# Altium PCB PCB1.PcbDoc
Units mm, origin at the board's own origin, x right, y up, seen from the top; angles counter-clockwise.
Board outline 90 x 45 mm, 2 copper layers (Top Layer, Bottom Layer); 95 components, 49 nets, 291 pads, 92 vias.
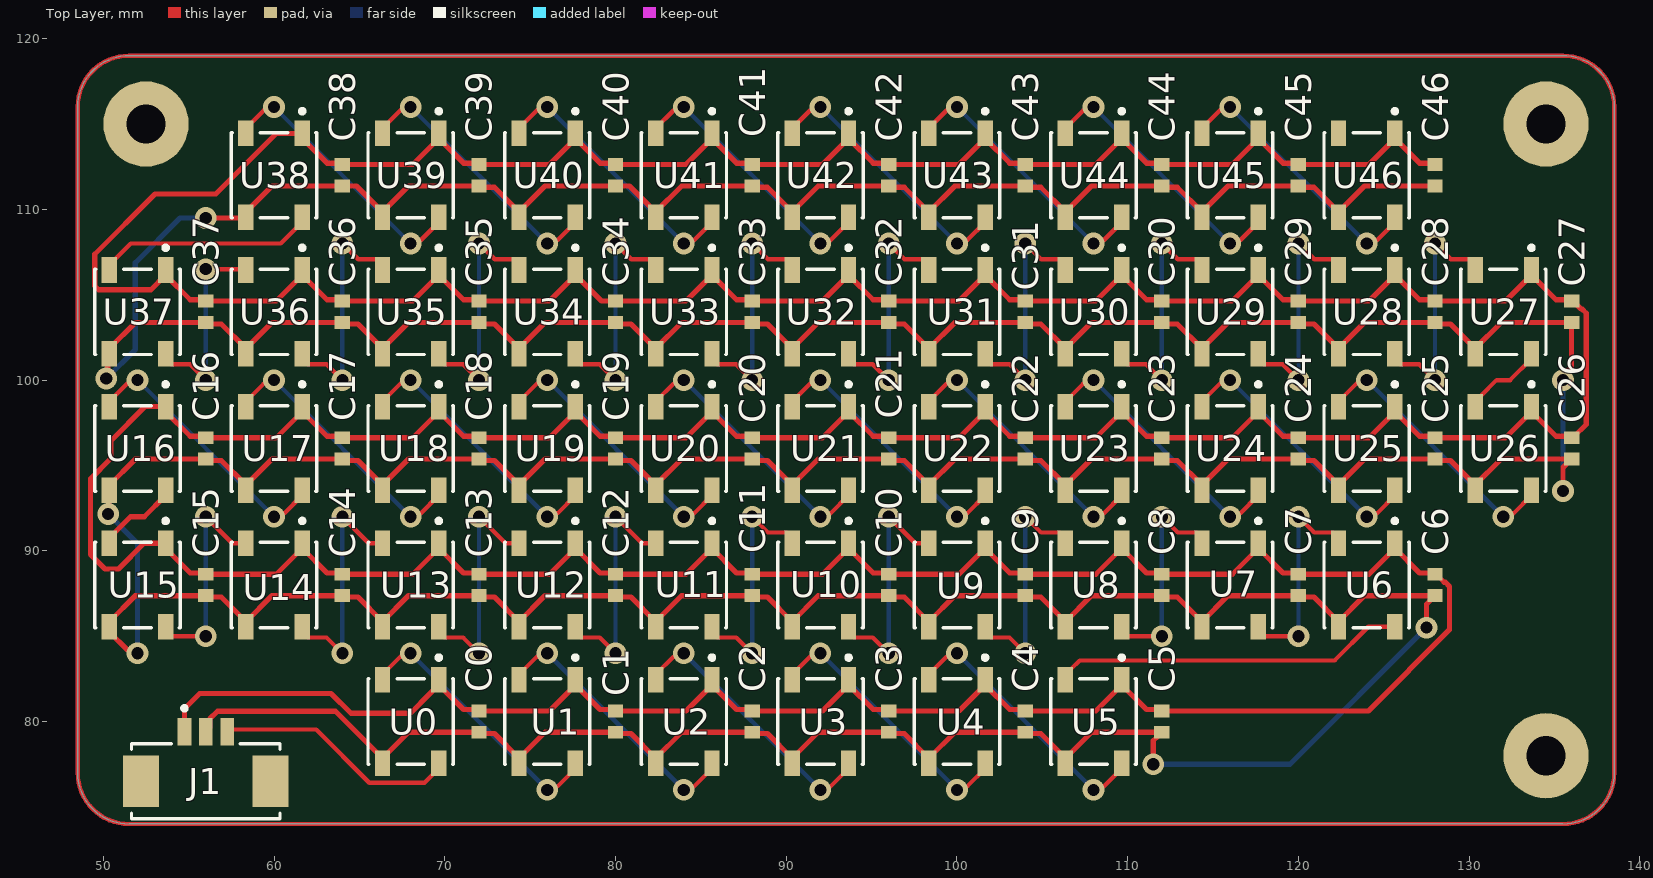
[diagram p0: Top Layer view]
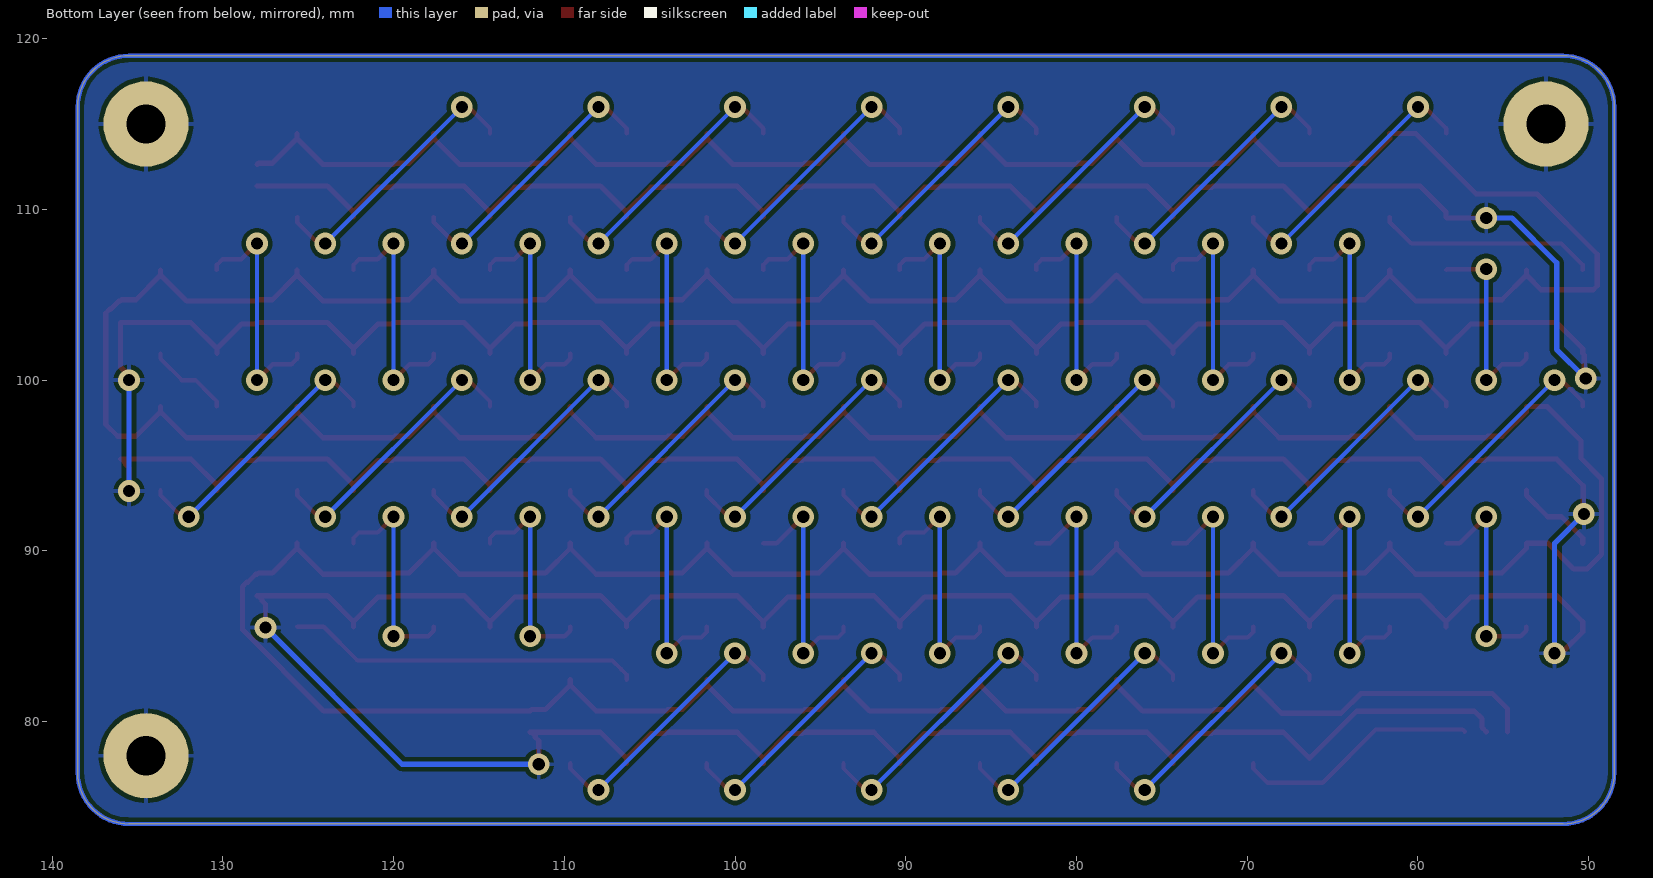
[diagram p1: Bottom Layer view, seen from below]
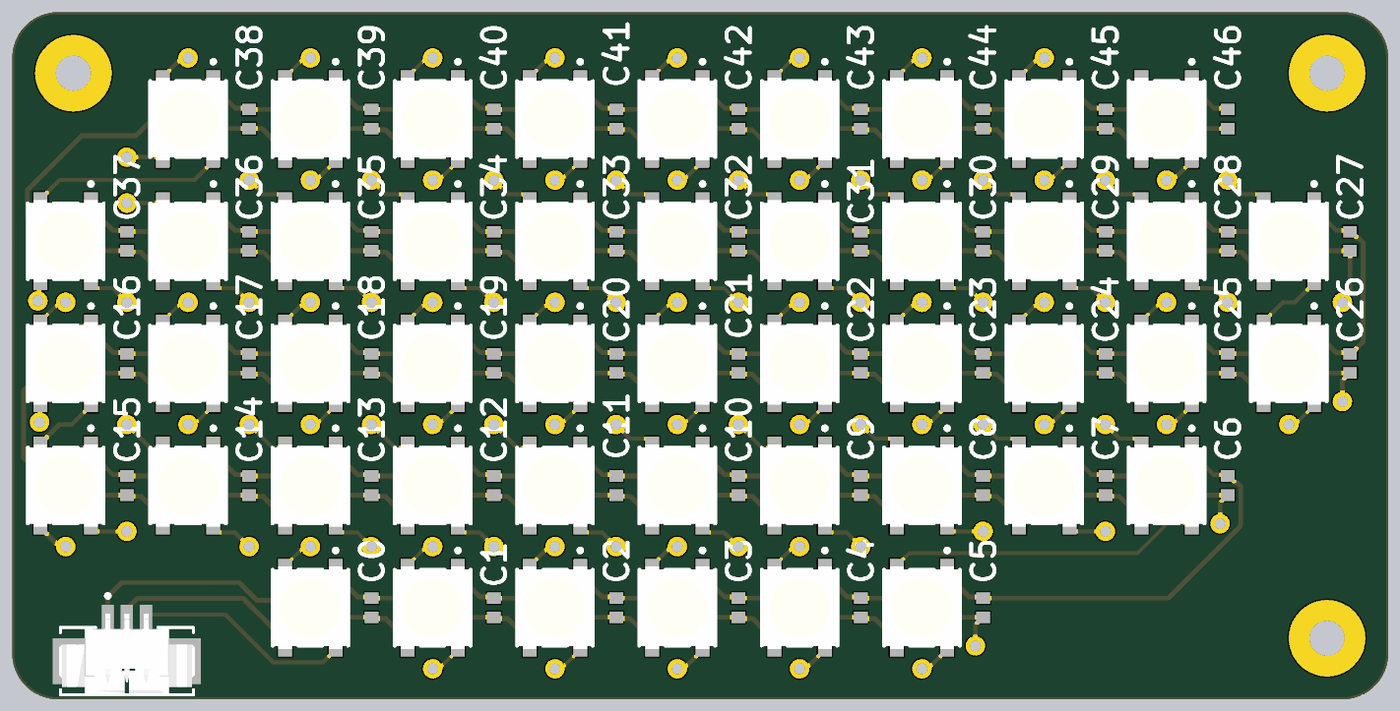
[diagram p2: 3D render of the assembled board from above, using the file's embedded part models]

## Layer stack, top to bottom
Top Solder: solder mask 0.0102, Solder Resist, Dk 3.5
Top Layer: signal copper 0.0356
Dielectric 1: dielectric 0.32, FR-4, Dk 4.8
Bottom Layer: signal copper 0.0356
Bottom Solder: solder mask 0.0102, Solder Resist, Dk 3.5

## Board outline
48.5,77 48.5,116 cw(c51.5,116) 51.5,119 135.5,119 cw(c135.5,116) 138.5,116 138.5,77 cw(c135.5,77) 135.5,74 51.5,74 cw(c51.5,77)

## Design rules (kind name [scope] priority, off if disabled: settings)
Clearance [All] p1: gap=0.254 ignorepadtopadclearanceinfootprint=FALSE
PolygonConnect [All] p1: connectstyle=Relief reliefconductorwidth=0.254 reliefentries=4 polygonreliefangle="90 Angle" airgapwidth=0.254
RoutingVias [All] p1: holewidth=0.711 width=1.27 viastyle="Through Hole" minholewidth=0.711 minwidth=1.27 maxholewidth=0.711 maxwidth=1.27
SolderMaskExpansion [All] p1: expansion=0.102 istentingtop=FALSE
SupplyNets "Schematic Supply Nets_1" [InNet('GND')] p1: voltage=0.000
SupplyNets "Schematic Supply Nets" [InNet('VCC')] p2: voltage=0.000
Width [All] p1: maxlimit=0.305 minlimit=0.254 preferedwidth=0.254 minimp=50.000000 maximp=50.000000 favimp=50.000000
30 further rules are at their usual default settings.

## Components (designator, comment, footprint, x,y, rotation, side; value= is the part's Value field where it differs from the comment)
C0 "VJ0603Y104JXJAC" CAPC1608X92X38LL15T08 72,80 r270 top
C1 "VJ0603Y104JXJAC" CAPC1608X92X38LL15T08 80,80 r270 top
C2 "VJ0603Y104JXJAC" CAPC1608X92X38LL15T08 88,80 r270 top
C3 "VJ0603Y104JXJAC" CAPC1608X92X38LL15T08 96,80 r270 top
C4 "VJ0603Y104JXJAC" CAPC1608X92X38LL15T08 104,80 r270 top
C5 "VJ0603Y104JXJAC" CAPC1608X92X38LL15T08 112,80 r270 top
C6 "VJ0603Y104JXJAC" CAPC1608X92X38LL15T08 128,88 r270 top
C7 "VJ0603Y104JXJAC" CAPC1608X92X38LL15T08 120,88 r270 top
C8 "VJ0603Y104JXJAC" CAPC1608X92X38LL15T08 112,88 r270 top
C9 "VJ0603Y104JXJAC" CAPC1608X92X38LL15T08 104,88 r270 top
C10 "VJ0603Y104JXJAC" CAPC1608X92X38LL15T08 96,88 r270 top
C11 "VJ0603Y104JXJAC" CAPC1608X92X38LL15T08 88,88 r270 top
C12 "VJ0603Y104JXJAC" CAPC1608X92X38LL15T08 80,88 r270 top
C13 "VJ0603Y104JXJAC" CAPC1608X92X38LL15T08 72,88 r270 top
C14 "VJ0603Y104JXJAC" CAPC1608X92X38LL15T08 64,88 r270 top
C15 "VJ0603Y104JXJAC" CAPC1608X92X38LL15T08 56,88 r270 top
C16 "VJ0603Y104JXJAC" CAPC1608X92X38LL15T08 56,96 r270 top
C17 "VJ0603Y104JXJAC" CAPC1608X92X38LL15T08 64,96 r270 top
C18 "VJ0603Y104JXJAC" CAPC1608X92X38LL15T08 72,96 r270 top
C19 "VJ0603Y104JXJAC" CAPC1608X92X38LL15T08 80,96 r270 top
C20 "VJ0603Y104JXJAC" CAPC1608X92X38LL15T08 88,96 r270 top
C21 "VJ0603Y104JXJAC" CAPC1608X92X38LL15T08 96,96 r270 top
C22 "VJ0603Y104JXJAC" CAPC1608X92X38LL15T08 104,96 r270 top
C23 "VJ0603Y104JXJAC" CAPC1608X92X38LL15T08 112,96 r270 top
C24 "VJ0603Y104JXJAC" CAPC1608X92X38LL15T08 120,96 r270 top
C25 "VJ0603Y104JXJAC" CAPC1608X92X38LL15T08 128,96 r270 top
C26 "VJ0603Y104JXJAC" CAPC1608X92X38LL15T08 136,96 r270 top
C27 "VJ0603Y104JXJAC" CAPC1608X92X38LL15T08 136,104 r270 top
C28 "VJ0603Y104JXJAC" CAPC1608X92X38LL15T08 128,104 r270 top
C29 "VJ0603Y104JXJAC" CAPC1608X92X38LL15T08 120,104 r270 top
C30 "VJ0603Y104JXJAC" CAPC1608X92X38LL15T08 112,104 r270 top
C31 "VJ0603Y104JXJAC" CAPC1608X92X38LL15T08 104,104 r270 top
C32 "VJ0603Y104JXJAC" CAPC1608X92X38LL15T08 96,104 r270 top
C33 "VJ0603Y104JXJAC" CAPC1608X92X38LL15T08 88,104 r270 top
C34 "VJ0603Y104JXJAC" CAPC1608X92X38LL15T08 80,104 r270 top
C35 "VJ0603Y104JXJAC" CAPC1608X92X38LL15T08 72,104 r270 top
C36 "VJ0603Y104JXJAC" CAPC1608X92X38LL15T08 64,104 r270 top
C37 "VJ0603Y104JXJAC" CAPC1608X92X38LL15T08 56,104 r270 top
C38 "VJ0603Y104JXJAC" CAPC1608X92X38LL15T08 64,112 r270 top
C39 "VJ0603Y104JXJAC" CAPC1608X92X38LL15T08 72,112 r270 top
C40 "VJ0603Y104JXJAC" CAPC1608X92X38LL15T08 80,112 r270 top
C41 "VJ0603Y104JXJAC" CAPC1608X92X38LL15T08 88,112 r270 top
C42 "VJ0603Y104JXJAC" CAPC1608X92X38LL15T08 96,112 r270 top
C43 "VJ0603Y104JXJAC" CAPC1608X92X38LL15T08 104,112 r270 top
C44 "VJ0603Y104JXJAC" CAPC1608X92X38LL15T08 112,112 r270 top
C45 "VJ0603Y104JXJAC" CAPC1608X92X38LL15T08 120,112 r270 top
C46 "VJ0603Y104JXJAC" CAPC1608X92X38LL15T08 128,112 r270 top
J1 "53261-0371" FP-53261-0371-MFG 56,76.5 r0 top
U0 "1655" ADA-RGB-1655_V 68,80 r270 top
U1 "1655" ADA-RGB-1655_V 76,80 r270 top
U2 "1655" ADA-RGB-1655_V 84,80 r270 top
U3 "1655" ADA-RGB-1655_V 92,80 r270 top
U4 "1655" ADA-RGB-1655_V 100,80 r270 top
U5 "1655" ADA-RGB-1655_V 108,80 r270 top
U6 "1655" ADA-RGB-1655_V 124,88 r270 top
U7 "1655" ADA-RGB-1655_V 116,88 r270 top
U8 "1655" ADA-RGB-1655_V 108,88 r270 top
U9 "1655" ADA-RGB-1655_V 100,88 r270 top
U10 "1655" ADA-RGB-1655_V 92,88 r270 top
U11 "1655" ADA-RGB-1655_V 84,88 r270 top
U12 "1655" ADA-RGB-1655_V 76,88 r270 top
U13 "1655" ADA-RGB-1655_V 68,88 r270 top
U14 "1655" ADA-RGB-1655_V 60,88 r270 top
U15 "1655" ADA-RGB-1655_V 52,88 r270 top
U16 "1655" ADA-RGB-1655_V 52,96 r270 top
U17 "1655" ADA-RGB-1655_V 60,96 r270 top
U18 "1655" ADA-RGB-1655_V 68,96 r270 top
U19 "1655" ADA-RGB-1655_V 76,96 r270 top
U20 "1655" ADA-RGB-1655_V 84,96 r270 top
U21 "1655" ADA-RGB-1655_V 92,96 r270 top
U22 "1655" ADA-RGB-1655_V 100,96 r270 top
U23 "1655" ADA-RGB-1655_V 108,96 r270 top
U24 "1655" ADA-RGB-1655_V 116,96 r270 top
U25 "1655" ADA-RGB-1655_V 124,96 r270 top
U26 "1655" ADA-RGB-1655_V 132,96 r270 top
U27 "1655" ADA-RGB-1655_V 132,104 r270 top
U28 "1655" ADA-RGB-1655_V 124,104 r270 top
U29 "1655" ADA-RGB-1655_V 116,104 r270 top
U30 "1655" ADA-RGB-1655_V 108,104 r270 top
U31 "1655" ADA-RGB-1655_V 100,104 r270 top
U32 "1655" ADA-RGB-1655_V 92,104 r270 top
U33 "1655" ADA-RGB-1655_V 84,104 r270 top
U34 "1655" ADA-RGB-1655_V 76,104 r270 top
U35 "1655" ADA-RGB-1655_V 68,104 r270 top
U36 "1655" ADA-RGB-1655_V 60,104 r270 top
U37 "1655" ADA-RGB-1655_V 52,104 r270 top
U38 "1655" ADA-RGB-1655_V 60,112 r270 top
U39 "1655" ADA-RGB-1655_V 68,112 r270 top
U40 "1655" ADA-RGB-1655_V 76,112 r270 top
U41 "1655" ADA-RGB-1655_V 84,112 r270 top
U42 "1655" ADA-RGB-1655_V 92,112 r270 top
U43 "1655" ADA-RGB-1655_V 100,112 r270 top
U44 "1655" ADA-RGB-1655_V 108,112 r270 top
U45 "1655" ADA-RGB-1655_V 116,112 r270 top
U46 "1655" ADA-RGB-1655_V 124,112 r270 top

## Footprints (in the part's own frame and the unit in brackets; to place one, negate y for a bottom-side part, rotate by r counter-clockwise, add the part's x,y. Pads: shape width x height; smd on the part's side, far side on the other; paste and mask are expansions set on the pad)
ADA-RGB-1655_V [mm] "SMD, 4-Leads, Body 5x5mm"
  rect 1.5x0.9 smd: 1(-2.45,1.65) 2(-2.45,-1.65) 3(2.45,-1.65) 4(2.45,1.65)
  silkscreen extent -3.87,-2.5 2.5,2.5, body extent -2.7,-2.5 2.7,2.5, height 1.68
CAPC1608X92X38LL15T08 [mm] "Chip Capacitor, 2-Leads, Body 1.60x0.80mm, IPC High Density"
  rect 0.75x0.9 smd: 1(-0.625,0) 2(0.625,0)
  body extent -0.87,-0.48 0.87,0.48, height 0.92
FP-53261-0371-MFG [mm]
  rect 0.8x1.6 smd paste+0 mask+0: 1(-1.25,2.9) 2(0,2.9) 3(1.25,2.9)
  rect 2.1x3 smd paste+0 mask+0: 4(-3.8,0) 5(3.8,0)
  silkscreen extent -4.35,-2.2 4.35,4.4, body extent -4.95,-2.3 4.95,3.8, height 0.25

## Part data
C0 C1 C2 C3 C4 C5 C6 C7 C8 C9 C10 C11 C12 C13 C14 C15 C16 C17 C18 C19 C20 C21 C22 C23 C24 C25 C26 C27 C28 C29 C30 C31 C32 C33 C34 C35 C36 C37 C38 C39 C40 C41 C42 C43 C44 C45 C46: library part CMP-1035-02583-2, Manufacturer=Vitramon, Part Number=VJ0603Y104JXJAC
J1: library part CMP-04776-000071-1, "CONN HEADER SMD R/A 3POS 1.25MM", Ambient Temperature Range High=+105°C, Ambient Temperature Range Low=-40°C, Current Rating=1A, Manufacturer=Molex, Package=0, Temperature="-40°C to +105°C", Voltage Rating=125V, Automotive=No, Category=Conn, ComponentLink2Description=Datasheet, ComponentLink2URL=https://www.molex.com/webdocs/datasheets/pdf/en-us/0532610371_PCB_HEADERS.pdf, Conn Gender=Male, Conn Orientation="Right Angle", Contact Material=Tin,Nickel, Device Class L1=Connectors, Device Class L2="Headers and Wire Housings", Device Class L3=unset, Digikey Description="CONN HEADER SMD R/A 3POS 1.25MM", Footprint Url=https://www.molex.com/pdm_docs/sd/532610371_sd.pdf, Height=3.6mm, Lead Free=Yes, Manufacturer Part Number=53261-0371, Mouser Description="1.25mm (.049\") Pitch PicoBlade Header, Surface Mount, Right Angle, Lead-free, 3 Circuits", Number Of Contacts=3, Number Of Rows=1, Octopart=https://octopart.com/53261-0371-molex-655314, Pitch=1.25mm, RoHS=TRUE, Temperature Range High=+105°C, Temperature Range Low=-40°C
U0 U1 U2 U3 U4 U5 U6 U7 U8 U9 U10 U11 U12 U13 U14 U15 U16 U17 U18 U19 U20 U21 U22 U23 U24 U25 U26 U27 U28 U29 U30 U31 U32 U33 U34 U35 U36 U37 U38 U39 U40 U41 U42 U43 U44 U45 U46: library part CMP-2000-05026-1, "Intelligent Control LED Integrated Light Source, 3.5 to 5.3 V, -25 to 80 degC, 4-Pin SMD, RoHS, Tape and Reel", Color=Red,Green,Blue(RGB), Manufacturer=Adafruit-Industries-LLC, Package Description="4-Pin Surface Mount Device, Body 5 x 5 mm", Category=Optoelectronics, Configuration=Discrete, Controller Type=-, Datasheet URL=http://datasheet.octopart.com/ADA1655-Adafruit-Industries-datasheet-32028139.pdf, Datasheet Version=May-13, Family=Addressable,Specialty, Interface=-, Manufacturer URL=https://www.adafruit.com/, Mounting Type=SurfaceMount, Number of LEDs=10, Package Reference=1655, Series=Neopixel, Size / Dimension=5.00mmLx5.00mmW, Utilized LED=WS2812(5050)

## Free pads (board coordinates)
  round 5 hole 2.3: 2(134.5,78) 2(212.5,40.5) 3(52.5,115) 4(134.5,115)

## Via types
v1: diameter 1.27, hole 0.711, Top Layer to Bottom Layer, 92 vias

## Nets (pads, with @x,y where several pads share a name; then routed paths per layer and width w, separated by ;. In a path a pad name is that pad's centre, name@x,y a point inside that pad or via, vN(x,y) a via of type N, cw(c..) or ccw(c..) an arc to the next point about the centre after c; other vN are vias at no path point)
Din: J1.3 U0.4 | length 14.4
  Top Layer w0.254: J1.3 57.385,79.535 62.465,79.535 65.581,76.419 68.811,76.419 69.319,76.927 69.327,76.927 69.65,77.25 U0.4
GND: C0.2 C1.2 C2.2 C3.2 C4.2 C5.2 C6.2 C7.2 C8.2 C9.2 C10.2 C11.2 C12.2 C13.2 C14.2 C15.2 C16.2 C17.2 C18.2 C19.2 C20.2 C21.2 C22.2 C23.2 C24.2 C25.2 C26.2 C27.2 C28.2 C29.2 C30.2 C31.2 C32.2 C33.2 C34.2 C35.2 C36.2 C37.2 C38.2 C39.2 C40.2 C41.2 C42.2 C43.2 C44.2 C45.2 C46.2 J1.2 pad.2@134.5,78 pad.3 pad.4 U0.3 U1.3 U2.3 U3.3 U4.3 U5.3 U6.3 U7.3 U8.3 U9.3 U10.3 U11.3 U12.3 U13.3 U14.3 U15.3 U16.3 U17.3 U18.3 U19.3 U20.3 U21.3 U22.3 U23.3 U24.3 U25.3 U26.3 U27.3 U28.3 U29.3 U30.3 U31.3 U32.3 U33.3 U34.3 U35.3 U36.3 U37.3 U38.3 U39.3 U40.3 U41.3 U42.3 U43.3 U44.3 U45.3 U46.3 | length 510.7
  Top Layer w0.305: v1(50.175,100.089) 50.263,100.177 50.263,101.462 U37.3 50.35,101.85 51.875,103.375 C37.2 56.082,103.293 56.907,103.293 U36.3@58.35,101.85 ; v1(50.283,92.156) 50.317,92.189 50.317,93.817 51.875,95.375 C16.2 56.082,95.293 56.907,95.293 58.35,93.85 59.875,95.375 C17.2 64.082,95.293 64.907,95.293 U18.3@66.35,93.85 ; v1(52,84) 51.815,84.185 51.415,84.185 50.35,85.25 50.35,85.85 51.875,87.375 C15.2 56.082,87.293 56.907,87.293 U14.3@58.35,85.85 ; J1.2 56.248,79.648 56.248,80.172 56.682,80.606 63.594,80.606 66.35,77.85 67.875,79.375 C0.2 72.082,79.293 72.907,79.293 U1.3@74.35,77.85 ; v1(56,109.5) 58.3,109.5 U38.3 58.35,109.85 59.875,111.375 C38.2 64.825,111.375 66.35,109.85 67.875,111.375 C39.2 72.082,111.293 72.907,111.293 U40.3@74.35,109.85 ; U14.3 U14.3@58.35,85.85 ; U36.3 U36.3@58.35,101.85 ; U13.3 U13.3@66.35,85.85 ; U18.3 U18.3@66.35,93.85 ; U35.3 U35.3@66.35,101.85 ; U1.3 U1.3@74.35,77.85 ; U12.3 U12.3@74.35,85.85 ; U19.3 U19.3@74.35,93.85 ; U34.3 U34.3@74.35,101.85 ; U40.3 U40.3@74.35,109.85 ; U2.3 U2.3@82.35,77.85 ; U11.3 U11.3@82.35,85.85 ; U20.3 U20.3@82.35,93.85 ; U33.3 U33.3@82.35,101.85 ; U3.3 U3.3@90.35,77.85 ; U10.3 U10.3@90.35,85.85 ; U21.3 U21.3@90.35,93.85 ; U32.3 U32.3@90.35,101.85 ; U42.3 U42.3@90.35,109.85 ; U4.3 U4.3@98.35,77.85 ; U9.3 U9.3@98.35,85.85 ; U22.3 U22.3@98.35,93.85 ; U31.3 U31.3@98.35,101.85 ; U43.3 U43.3@98.35,109.85 ; U5.3 U5.3@106.35,77.85 ; U8.3 U8.3@106.35,85.85 ; U23.3 U23.3@106.35,93.85 ; U30.3 U30.3@106.35,101.85 ; U44.3 U44.3@106.35,109.85 ; v1(111.5,77.5) 111.5,78.875 111.702,79.077 111.702,79.152 C5.2@111.925,79.375 ; C5.2 C5.2@111.925,79.375 ; U7.3 U7.3@114.35,85.85 ; U24.3 U24.3@114.35,93.85 ; U29.3 U29.3@114.35,101.85 ; U45.3 U45.3@114.35,109.85 ; U6.3 U6.3@122.35,85.85 ; U25.3 U25.3@122.35,93.85 ; U28.3 U28.3@122.35,101.85 ; U46.3 U46.3@122.35,109.85 ; v1(127.5,85.5) 127.5,86.875 127.702,87.077 127.702,87.152 127.925,87.375 C6.2 123.875,87.375 U6.3@122.35,85.85 ; C46.2 123.875,111.375 U46.3@122.35,109.85 ; U26.3 U26.3@130.35,93.85 ; U27.3 U27.3@130.35,101.85 ; v1(135.5,93.5) 135.5,94.875 135.702,95.077 135.702,95.152 135.925,95.375 C26.2 131.875,95.375 U26.3@130.35,93.85 ; v1(135.5,100) 135.5,100.261 136,100.761 C27.2 131.875,103.375 U27.3@130.35,101.85 ; U14.3@58.35,85.85 59.875,87.375 C14.2 64.082,87.293 64.907,87.293 U13.3@66.35,85.85 ; U36.3@58.35,101.85 59.875,103.375 C36.2 64.082,103.293 64.907,103.293 U35.3@66.35,101.85 ; U13.3@66.35,85.85 67.875,87.375 C13.2 72.082,87.293 72.907,87.293 U12.3@74.35,85.85 ; U18.3@66.35,93.85 67.875,95.375 C18.2 72.082,95.293 72.907,95.293 U19.3@74.35,93.85 ; U35.3@66.35,101.85 67.875,103.375 C35.2 72.082,103.293 72.907,103.293 U34.3@74.35,101.85 ; U1.3@74.35,77.85 75.875,79.375 C1.2 80.082,79.293 80.907,79.293 U2.3@82.35,77.85 ; U12.3@74.35,85.85 75.875,87.375 C12.2 80.082,87.293 80.907,87.293 U11.3@82.35,85.85 ; U19.3@74.35,93.85 75.875,95.375 C19.2 80.082,95.293 80.907,95.293 U20.3@82.35,93.85 ; U34.3@74.35,101.85 75.875,103.375 C34.2 80.082,103.293 80.907,103.293 U33.3@82.35,101.85 ; U40.3@74.35,109.85 75.875,111.375 C40.2 80.825,111.375 82.35,109.85 83.875,111.375 C41.2 88.082,111.293 88.907,111.293 U42.3@90.35,109.85 ; U2.3@82.35,77.85 83.875,79.375 C2.2 88.082,79.293 88.907,79.293 U3.3@90.35,77.85 ; U11.3@82.35,85.85 83.875,87.375 C11.2 88.082,87.293 88.907,87.293 U10.3@90.35,85.85 ; U20.3@82.35,93.85 83.875,95.375 C20.2 88.082,95.293 88.907,95.293 U21.3@90.35,93.85 ; U33.3@82.35,101.85 83.875,103.375 C33.2 88.082,103.293 88.907,103.293 U32.3@90.35,101.85 ; U3.3@90.35,77.85 91.875,79.375 C3.2 96.082,79.293 96.907,79.293 U4.3@98.35,77.85 ; U10.3@90.35,85.85 91.875,87.375 C10.2 96.082,87.293 96.907,87.293 U9.3@98.35,85.85 ; U21.3@90.35,93.85 91.875,95.375 C21.2 96.082,95.293 96.907,95.293 U22.3@98.35,93.85 ; U32.3@90.35,101.85 91.875,103.375 C32.2 96.082,103.293 96.907,103.293 U31.3@98.35,101.85 ; U42.3@90.35,109.85 91.875,111.375 C42.2 96.082,111.293 96.907,111.293 U43.3@98.35,109.85 ; U4.3@98.35,77.85 99.875,79.375 C4.2 104.082,79.293 104.907,79.293 U5.3@106.35,77.85 ; U9.3@98.35,85.85 99.875,87.375 C9.2 104.082,87.293 104.907,87.293 U8.3@106.35,85.85 ; U22.3@98.35,93.85 99.875,95.375 C22.2 104.082,95.293 104.907,95.293 U23.3@106.35,93.85 ; U31.3@98.35,101.85 99.875,103.375 C31.2 104.082,103.293 104.907,103.293 U30.3@106.35,101.85 ; U43.3@98.35,109.85 99.875,111.375 C43.2 104.082,111.293 104.907,111.293 U44.3@106.35,109.85 ; U5.3@106.35,77.85 107.875,79.375 C5.2@111.925,79.375 ; U8.3@106.35,85.85 107.875,87.375 C8.2 112.082,87.293 112.907,87.293 U7.3@114.35,85.85 ; U23.3@106.35,93.85 107.875,95.375 C23.2 112.082,95.293 112.907,95.293 U24.3@114.35,93.85 ; U30.3@106.35,101.85 107.875,103.375 C30.2 112.082,103.293 112.907,103.293 U29.3@114.35,101.85 ; U44.3@106.35,109.85 107.875,111.375 C44.2 112.082,111.293 112.907,111.293 U45.3@114.35,109.85 ; U7.3@114.35,85.85 115.875,87.375 C7.2 120.082,87.293 120.907,87.293 U6.3@122.35,85.85 ; U24.3@114.35,93.85 115.875,95.375 C24.2 120.082,95.293 120.907,95.293 U25.3@122.35,93.85 ; U29.3@114.35,101.85 115.875,103.375 C29.2 120.082,103.293 120.907,103.293 U28.3@122.35,101.85 ; U45.3@114.35,109.85 115.875,111.375 C45.2 120.082,111.293 120.907,111.293 U46.3@122.35,109.85 ; U25.3@122.35,93.85 123.875,95.375 C25.2 128.082,95.293 128.907,95.293 U26.3@130.35,93.85 ; U28.3@122.35,101.85 123.875,103.375 C28.2 128.082,103.293 128.907,103.293 U27.3@130.35,101.85
  Bottom Layer w0.305: v1(50.175,100.089) 51.875,101.789 51.875,106.875 54.5,109.5 v1(56,109.5) ; v1(50.283,92.156) 52,90.439 v1(52,84) ; v1(111.5,77.5) 119.5,77.5 v1(127.5,85.5) ; v1(135.5,93.5) v1(135.5,100)
NetU0_2: U0.2 U1.4 | length 16.2
  Top Layer w0.254: U0.2 66.35,82.75 67.406,83.806 67.806,83.806 v1(68,84) ; v1(76,76) 76.194,76.194 76.594,76.194 77.65,77.25 U1.4
  Bottom Layer w0.254: v1(68,84) v1(76,76)
NetU1_2: U1.2 U2.4 | length 16.2
  Top Layer w0.254: U1.2 74.35,82.75 75.406,83.806 75.806,83.806 v1(76,84) ; v1(84,76) 84.194,76.194 84.594,76.194 85.65,77.25 U2.4
  Bottom Layer w0.254: v1(76,84) v1(84,76)
NetU2_2: U2.2 U3.4 | length 16.2
  Top Layer w0.254: U2.2 82.35,82.75 83.406,83.806 83.806,83.806 v1(84,84) ; v1(92,76) 92.194,76.194 92.594,76.194 93.65,77.25 U3.4
  Bottom Layer w0.254: v1(84,84) v1(92,76)
NetU3_2: U3.2 U4.4 | length 16.2
  Top Layer w0.254: U3.2 90.35,82.75 91.406,83.806 91.806,83.806 v1(92,84) ; v1(100,76) 100.194,76.194 100.594,76.194 101.65,77.25 U4.4
  Bottom Layer w0.254: v1(92,84) v1(100,76)
NetU4_2: U4.2 U5.4 | length 16.2
  Top Layer w0.254: U4.2 98.35,82.75 99.406,83.806 99.806,83.806 v1(100,84) ; v1(108,76) 108.194,76.194 108.594,76.194 109.65,77.25 U5.4
  Bottom Layer w0.254: v1(100,84) v1(108,76)
NetU5_2: U5.2 U6.4 | length 20.8
  Top Layer w0.254: U5.2 106.35,82.75 106.673,83.073 106.681,83.073 107.189,83.581 122.12,83.581 124.089,85.55 U6.4
NetU6_2: U6.2 U7.4 | length 12.9
  Top Layer w0.254: U7.4 117.65,85.323 117.973,85 v1(120,85) ; v1(120,92) 120.927,91.073 122.027,91.073 122.35,90.75 U6.2
  Bottom Layer w0.254: v1(120,85) v1(120,92)
NetU7_2: U7.2 U8.4 | length 12.9
  Top Layer w0.254: U8.4 109.65,85.323 109.973,85 v1(112,85) ; v1(112,92) 112.927,91.073 114.027,91.073 114.35,90.75 U7.2
  Bottom Layer w0.254: v1(112,85) v1(112,92)
NetU8_2: U8.2 U9.4 | length 14.3
  Top Layer w0.254: U9.4 101.65,85.25 101.973,84.927 103.073,84.927 v1(104,84) ; v1(104,92) 104.927,91.073 106.027,91.073 106.35,90.75 U8.2
  Bottom Layer w0.254: v1(104,84) v1(104,92)
NetU9_2: U9.2 U10.4 | length 14.2
  Top Layer w0.254: U10.4 93.65,85.25 93.973,84.927 95.073,84.927 v1(96,84) ; v1(96,92) 97.55,90.45 U9.2
  Bottom Layer w0.254: v1(96,84) v1(96,92)
NetU10_2: U10.2 U11.4 | length 14.3
  Top Layer w0.254: U11.4 85.65,85.25 85.973,84.927 87.073,84.927 v1(88,84) ; v1(88,92) 88.927,91.073 90.027,91.073 90.35,90.75 U10.2
  Bottom Layer w0.254: v1(88,84) v1(88,92)
NetU11_2: U11.2 U12.4 | length 14.2
  Top Layer w0.254: U12.4 77.65,85.25 77.973,84.927 79.073,84.927 v1(80,84) ; v1(80,92) 81.55,90.45 U11.2
  Bottom Layer w0.254: v1(80,84) v1(80,92)
NetU12_2: U12.2 U13.4 | length 14.2
  Top Layer w0.254: U13.4 69.65,85.25 69.973,84.927 71.073,84.927 v1(72,84) ; v1(72,92) 73.55,90.45 U12.2
  Bottom Layer w0.254: v1(72,84) v1(72,92)
NetU13_2: U13.2 U14.4 | length 14.2
  Top Layer w0.254: U14.4 61.65,85.25 61.973,84.927 63.073,84.927 v1(64,84) ; v1(64,92) 65.55,90.45 U13.2
  Bottom Layer w0.254: v1(64,84) v1(64,92)
NetU14_2: U14.2 U15.4 | length 12.7
  Top Layer w0.254: U15.4 53.65,85.323 53.973,85 v1(56,85) ; v1(56,92) 57.55,90.45 U14.2
  Bottom Layer w0.254: v1(56,85) v1(56,92)
NetU15_2: U15.2 U16.4 | length 4.9
  Top Layer w0.305: U15.2 50.35,90.75 51.6,92 52.4,92 53.65,93.25 U16.4
NetU16_2: U16.2 U17.4 | length 16.2
  Top Layer w0.254: U16.2 50.35,98.75 51.406,99.806 51.806,99.806 v1(52,100) ; v1(60,92) 60.194,92.194 60.594,92.194 61.65,93.25 U17.4
  Bottom Layer w0.254: v1(52,100) v1(60,92)
NetU17_2: U17.2 U18.4 | length 16.2
  Top Layer w0.254: U17.2 58.35,98.75 59.406,99.806 59.806,99.806 v1(60,100) ; v1(68,92) 68.194,92.194 68.594,92.194 69.65,93.25 U18.4
  Bottom Layer w0.254: v1(60,100) v1(68,92)
NetU18_2: U18.2 U19.4 | length 16.2
  Top Layer w0.254: U18.2 66.35,98.75 67.406,99.806 67.806,99.806 v1(68,100) ; v1(76,92) 76.194,92.194 76.594,92.194 77.65,93.25 U19.4
  Bottom Layer w0.254: v1(68,100) v1(76,92)
NetU19_2: U19.2 U20.4 | length 16.2
  Top Layer w0.254: U19.2 74.35,98.75 75.406,99.806 75.806,99.806 v1(76,100) ; v1(84,92) 84.194,92.194 84.594,92.194 85.65,93.25 U20.4
  Bottom Layer w0.254: v1(76,100) v1(84,92)
NetU20_2: U20.2 U21.4 | length 16.2
  Top Layer w0.254: U20.2 82.35,98.75 83.406,99.806 83.806,99.806 v1(84,100) ; v1(92,92) 92.194,92.194 92.594,92.194 93.65,93.25 U21.4
  Bottom Layer w0.254: v1(84,100) v1(92,92)
NetU21_2: U21.2 U22.4 | length 16.2
  Top Layer w0.254: U21.2 90.35,98.75 91.406,99.806 91.806,99.806 v1(92,100) ; v1(100,92) 100.194,92.194 100.594,92.194 101.65,93.25 U22.4
  Bottom Layer w0.254: v1(92,100) v1(100,92)
NetU22_2: U22.2 U23.4 | length 16.2
  Top Layer w0.254: U22.2 98.35,98.75 99.406,99.806 99.806,99.806 v1(100,100) ; v1(108,92) 108.194,92.194 108.594,92.194 109.65,93.25 U23.4
  Bottom Layer w0.254: v1(100,100) v1(108,92)
NetU23_2: U23.2 U24.4 | length 16.2
  Top Layer w0.254: U23.2 106.35,98.75 107.406,99.806 107.806,99.806 v1(108,100) ; v1(116,92) 116.194,92.194 116.594,92.194 117.65,93.25 U24.4
  Bottom Layer w0.254: v1(108,100) v1(116,92)
NetU24_2: U24.2 U25.4 | length 16.2
  Top Layer w0.254: U24.2 114.35,98.75 115.406,99.806 115.806,99.806 v1(116,100) ; v1(124,92) 124.194,92.194 124.594,92.194 125.65,93.25 U25.4
  Bottom Layer w0.254: v1(116,100) v1(124,92)
NetU25_2: U25.2 U26.4 | length 16.2
  Top Layer w0.254: U25.2 122.35,98.75 123.406,99.806 123.806,99.806 v1(124,100) ; v1(132,92) 132.194,92.194 132.594,92.194 133.65,93.25 U26.4
  Bottom Layer w0.254: v1(124,100) v1(132,92)
NetU26_2: U26.2 U27.4 | length 4.9
  Top Layer w0.254: U26.2 130.35,98.75 130.673,99.073 130.681,99.073 131.608,100 132.4,100 133.65,101.25 U27.4
NetU27_2: U27.2 U28.4 | length 14.3
  Top Layer w0.254: U28.4 125.65,101.25 125.973,100.927 127.073,100.927 v1(128,100) ; v1(128,108) 128.927,107.073 130.027,107.073 130.35,106.75 U27.2
  Bottom Layer w0.254: v1(128,100) v1(128,108)
NetU28_2: U28.2 U29.4 | length 14.3
  Top Layer w0.254: U29.4 117.65,101.25 117.973,100.927 119.073,100.927 v1(120,100) ; v1(120,108) 120.927,107.073 122.027,107.073 122.35,106.75 U28.2
  Bottom Layer w0.254: v1(120,100) v1(120,108)
NetU29_2: U29.2 U30.4 | length 14.3
  Top Layer w0.254: U30.4 109.65,101.25 109.973,100.927 111.073,100.927 v1(112,100) ; v1(112,108) 112.927,107.073 114.027,107.073 114.35,106.75 U29.2
  Bottom Layer w0.254: v1(112,100) v1(112,108)
NetU30_2: U30.2 U31.4 | length 14.3
  Top Layer w0.254: U31.4 101.65,101.25 101.973,100.927 103.073,100.927 v1(104,100) ; v1(104,108) 104.927,107.073 106.027,107.073 106.35,106.75 U30.2
  Bottom Layer w0.254: v1(104,100) v1(104,108)
NetU31_2: U31.2 U32.4 | length 14.3
  Top Layer w0.254: U32.4 93.65,101.25 93.973,100.927 95.073,100.927 v1(96,100) ; v1(96,108) 96.927,107.073 98.027,107.073 98.35,106.75 U31.2
  Bottom Layer w0.254: v1(96,100) v1(96,108)
NetU32_2: U32.2 U33.4 | length 14.3
  Top Layer w0.254: U33.4 85.65,101.25 85.973,100.927 87.073,100.927 v1(88,100) ; v1(88,108) 88.927,107.073 90.027,107.073 90.35,106.75 U32.2
  Bottom Layer w0.254: v1(88,100) v1(88,108)
NetU33_2: U33.2 U34.4 | length 14.3
  Top Layer w0.254: U34.4 77.65,101.25 77.973,100.927 79.073,100.927 v1(80,100) ; v1(80,108) 80.927,107.073 82.027,107.073 82.35,106.75 U33.2
  Bottom Layer w0.254: v1(80,100) v1(80,108)
NetU34_2: U34.2 U35.4 | length 14.3
  Top Layer w0.254: U35.4 69.65,101.25 69.973,100.927 71.073,100.927 v1(72,100) ; v1(72,108) 72.927,107.073 74.027,107.073 74.35,106.75 U34.2
  Bottom Layer w0.254: v1(72,100) v1(72,108)
NetU35_2: U35.2 U36.4 | length 14.3
  Top Layer w0.254: U36.4 61.65,101.25 61.973,100.927 63.073,100.927 v1(64,100) ; v1(64,108) 64.927,107.073 66.027,107.073 66.35,106.75 U35.2
  Bottom Layer w0.254: v1(64,100) v1(64,108)
NetU36_2: U36.2 U37.4 | length 12
  Top Layer w0.254: U37.4 53.65,101.25 53.973,100.927 55.073,100.927 v1(56,100) ; v1(56,106.5) 58.3,106.5 U36.2
  Bottom Layer w0.254: v1(56,100) v1(56,106.5)
NetU37_2: U37.2 U38.4 | length 12.9
  Top Layer w0.254: U37.2 50.35,106.75 51.6,108 60.392,108 61.319,108.927 61.327,108.927 61.65,109.25 U38.4
NetU38_2: U38.2 U39.4 | length 16.2
  Top Layer w0.254: U38.2 58.35,114.75 59.406,115.806 59.806,115.806 v1(60,116) ; v1(68,108) 68.194,108.194 68.594,108.194 69.65,109.25 U39.4
  Bottom Layer w0.254: v1(60,116) v1(68,108)
NetU39_2: U39.2 U40.4 | length 16.2
  Top Layer w0.254: U39.2 66.35,114.75 67.406,115.806 67.806,115.806 v1(68,116) ; v1(76,108) 76.194,108.194 76.594,108.194 77.65,109.25 U40.4
  Bottom Layer w0.254: v1(68,116) v1(76,108)
NetU40_2: U40.2 U41.4 | length 16.2
  Top Layer w0.254: U40.2 74.35,114.75 75.406,115.806 75.806,115.806 v1(76,116) ; v1(84,108) 84.194,108.194 84.594,108.194 85.65,109.25 U41.4
  Bottom Layer w0.254: v1(76,116) v1(84,108)
NetU41_2: U41.2 U42.4 | length 16.2
  Top Layer w0.254: U41.2 82.35,114.75 83.406,115.806 83.806,115.806 v1(84,116) ; v1(92,108) 92.194,108.194 92.594,108.194 93.65,109.25 U42.4
  Bottom Layer w0.254: v1(84,116) v1(92,108)
NetU42_2: U42.2 U43.4 | length 16.2
  Top Layer w0.254: U42.2 90.35,114.75 91.406,115.806 91.806,115.806 v1(92,116) ; v1(100,108) 100.194,108.194 100.594,108.194 101.65,109.25 U43.4
  Bottom Layer w0.254: v1(92,116) v1(100,108)
NetU43_2: U43.2 U44.4 | length 16.2
  Top Layer w0.254: U43.2 98.35,114.75 99.406,115.806 99.806,115.806 v1(100,116) ; v1(108,108) 108.194,108.194 108.594,108.194 109.65,109.25 U44.4
  Bottom Layer w0.254: v1(100,116) v1(108,108)
NetU44_2: U44.2 U45.4 | length 16.2
  Top Layer w0.254: U44.2 106.35,114.75 107.406,115.806 107.806,115.806 v1(108,116) ; v1(116,108) 116.194,108.194 116.594,108.194 117.65,109.25 U45.4
  Bottom Layer w0.254: v1(108,116) v1(116,108)
NetU45_2: U45.2 U46.4 | length 16.2
  Top Layer w0.254: U45.2 114.35,114.75 115.406,115.806 115.806,115.806 v1(116,116) ; v1(124,108) 124.194,108.194 124.594,108.194 125.65,109.25 U46.4
  Bottom Layer w0.254: v1(116,116) v1(124,108)
VCC: C0.1 C1.1 C2.1 C3.1 C4.1 C5.1 C6.1 C7.1 C8.1 C9.1 C10.1 C11.1 C12.1 C13.1 C14.1 C15.1 C16.1 C17.1 C18.1 C19.1 C20.1 C21.1 C22.1 C23.1 C24.1 C25.1 C26.1 C27.1 C28.1 C29.1 C30.1 C31.1 C32.1 C33.1 C34.1 C35.1 C36.1 C37.1 C38.1 C39.1 C40.1 C41.1 C42.1 C43.1 C44.1 C45.1 C46.1 J1.1 U0.1 U1.1 U2.1 U3.1 U4.1 U5.1 U6.1 U7.1 U8.1 U9.1 U10.1 U11.1 U12.1 U13.1 U14.1 U15.1 U16.1 U17.1 U18.1 U19.1 U20.1 U21.1 U22.1 U23.1 U24.1 U25.1 U26.1 U27.1 U28.1 U29.1 U30.1 U31.1 U32.1 U33.1 U34.1 U35.1 U36.1 U37.1 U38.1 U39.1 U40.1 U41.1 U42.1 U43.1 U44.1 U45.1 U46.1 | length 504.4
  Top Layer w0.305: U37.1 U37.1@53.65,106.15 ; J1.1 54.75,80.75 55.65,81.65 63.34,81.65 64.503,80.487 67.987,80.487 69.137,81.637 69.65,82.15 71.093,80.707 71.918,80.707 C0.1 76.125,80.625 U1.1@77.65,82.15 ; U14.1 U14.1@61.65,90.15 ; U17.1 U17.1@61.65,98.15 ; U36.1 U36.1@61.65,106.15 ; U13.1 U13.1@69.65,90.15 ; U18.1 U18.1@69.65,98.15 ; U35.1 U35.1@69.65,106.15 ; U39.1 U39.1@69.65,114.15 ; U1.1 U1.1@77.65,82.15 ; U12.1 U12.1@77.65,90.15 ; U19.1 U19.1@77.65,98.15 ; U2.1 U2.1@85.65,82.15 ; U11.1 U11.1@85.65,90.15 ; U20.1 U20.1@85.65,98.15 ; U33.1 U33.1@85.65,106.15 ; U41.1 U41.1@85.65,114.15 ; U3.1 U3.1@93.65,82.15 ; U10.1 U10.1@93.65,90.15 ; U21.1 U21.1@93.65,98.15 ; U32.1 U32.1@93.65,106.15 ; U42.1 U42.1@93.65,114.15 ; U4.1 U4.1@101.65,82.15 ; U9.1 U9.1@101.65,90.15 ; U22.1 U22.1@101.65,98.15 ; U31.1 U31.1@101.65,106.15 ; U43.1 U43.1@101.65,114.15 ; U5.1 U5.1@109.65,82.15 ; U8.1 U8.1@109.65,90.15 ; U23.1 U23.1@109.65,98.15 ; U30.1 U30.1@109.65,106.15 ; U44.1 U44.1@109.65,114.15 ; U7.1 U7.1@117.65,90.15 ; U24.1 U24.1@117.65,98.15 ; U29.1 U29.1@117.65,106.15 ; U45.1 U45.1@117.65,114.15 ; U6.1 U6.1@125.65,90.15 ; U25.1 U25.1@125.65,98.15 ; U28.1 U28.1@125.65,106.15 ; U46.1 U46.1@125.65,114.15 ; C46.1 127.918,112.707 127.093,112.707 U46.1@125.65,114.15 ; U26.1 U26.1@133.65,98.15 ; U27.1 U27.1@133.65,106.15 ; U37.1@53.65,106.15 55.093,104.707 55.918,104.707 C37.1 60.125,104.625 U36.1@61.65,106.15 ; U37.1@53.65,106.15 52.794,105.294 49.732,105.294 49.494,105.532 49.494,107.368 53.034,110.909 56.584,110.909 60.125,114.45 U38.1 61.65,114.15 63.093,112.707 63.918,112.707 C38.1 68.125,112.625 U39.1@69.65,114.15 ; U14.1@61.65,90.15 60.125,88.625 C15.1 55.918,88.707 55.093,88.707 53.65,90.15 U15.1 52.401,90.45 50.882,88.931 50.094,88.931 49.242,89.784 49.242,94.216 50.451,95.426 50.451,96.451 52.45,98.45 U16.1 53.65,98.15 55.093,96.707 55.918,96.707 C16.1 60.125,96.625 U17.1@61.65,98.15 ; U14.1@61.65,90.15 63.093,88.707 63.918,88.707 C14.1 68.125,88.625 U13.1@69.65,90.15 ; U17.1@61.65,98.15 63.093,96.707 63.918,96.707 C17.1 68.125,96.625 U18.1@69.65,98.15 ; U36.1@61.65,106.15 63.093,104.707 63.918,104.707 C36.1 68.125,104.625 U35.1@69.65,106.15 ; U13.1@69.65,90.15 71.093,88.707 71.918,88.707 C13.1 76.125,88.625 U12.1@77.65,90.15 ; U18.1@69.65,98.15 71.093,96.707 71.918,96.707 C18.1 76.125,96.625 U19.1@77.65,98.15 ; U35.1@69.65,106.15 71.093,104.707 71.918,104.707 C35.1 76.125,104.625 77.65,106.15 79.175,104.625 C34.1 84.125,104.625 U33.1@85.65,106.15 ; U39.1@69.65,114.15 71.093,112.707 71.918,112.707 C39.1 76.125,112.625 77.65,114.15 79.093,112.707 79.918,112.707 C40.1 84.125,112.625 U41.1@85.65,114.15 ; U1.1@77.65,82.15 79.093,80.707 79.918,80.707 C1.1 84.125,80.625 U2.1@85.65,82.15 ; U12.1@77.65,90.15 79.093,88.707 79.918,88.707 C12.1 84.125,88.625 U11.1@85.65,90.15 ; U19.1@77.65,98.15 79.093,96.707 79.918,96.707 C19.1 84.125,96.625 U20.1@85.65,98.15 ; U2.1@85.65,82.15 87.093,80.707 87.918,80.707 C2.1 92.125,80.625 U3.1@93.65,82.15 ; U11.1@85.65,90.15 87.093,88.707 87.918,88.707 C11.1 92.125,88.625 U10.1@93.65,90.15 ; U20.1@85.65,98.15 87.093,96.707 87.918,96.707 C20.1 92.125,96.625 U21.1@93.65,98.15 ; U33.1@85.65,106.15 87.093,104.707 87.918,104.707 C33.1 92.125,104.625 U32.1@93.65,106.15 ; U41.1@85.65,114.15 87.093,112.707 87.918,112.707 C41.1 92.125,112.625 U42.1@93.65,114.15 ; U3.1@93.65,82.15 95.093,80.707 95.918,80.707 C3.1 100.125,80.625 U4.1@101.65,82.15 ; U10.1@93.65,90.15 95.093,88.707 95.918,88.707 C10.1 100.125,88.625 U9.1@101.65,90.15 ; U21.1@93.65,98.15 95.093,96.707 95.918,96.707 C21.1 100.125,96.625 U22.1@101.65,98.15 ; U32.1@93.65,106.15 95.093,104.707 95.918,104.707 C32.1 100.125,104.625 U31.1@101.65,106.15 ; U42.1@93.65,114.15 95.093,112.707 95.918,112.707 C42.1 100.125,112.625 U43.1@101.65,114.15 ; U4.1@101.65,82.15 103.093,80.707 103.918,80.707 C4.1 108.125,80.625 U5.1@109.65,82.15 ; U9.1@101.65,90.15 103.093,88.707 103.918,88.707 C9.1 108.125,88.625 U8.1@109.65,90.15 ; U22.1@101.65,98.15 103.093,96.707 103.918,96.707 C22.1 108.125,96.625 U23.1@109.65,98.15 ; U31.1@101.65,106.15 103.093,104.707 103.918,104.707 C31.1 108.125,104.625 U30.1@109.65,106.15 ; U43.1@101.65,114.15 103.093,112.707 103.918,112.707 C43.1 108.125,112.625 U44.1@109.65,114.15 ; U5.1@109.65,82.15 111.093,80.707 111.918,80.707 C5.1 124.098,80.625 128.856,85.384 128.856,87.918 128.618,88.156 128.544,88.156 128.075,88.625 C6.1 127.918,88.707 127.093,88.707 U6.1@125.65,90.15 ; U8.1@109.65,90.15 111.093,88.707 111.918,88.707 C8.1 116.125,88.625 U7.1@117.65,90.15 ; U23.1@109.65,98.15 111.093,96.707 111.918,96.707 C23.1 116.125,96.625 U24.1@117.65,98.15 ; U30.1@109.65,106.15 111.093,104.707 111.918,104.707 C30.1 116.125,104.625 U29.1@117.65,106.15 ; U44.1@109.65,114.15 111.093,112.707 111.918,112.707 C44.1 116.125,112.625 U45.1@117.65,114.15 ; U7.1@117.65,90.15 119.093,88.707 119.918,88.707 C7.1 124.125,88.625 U6.1@125.65,90.15 ; U24.1@117.65,98.15 119.093,96.707 119.918,96.707 C24.1 124.125,96.625 U25.1@125.65,98.15 ; U29.1@117.65,106.15 119.093,104.707 119.918,104.707 C29.1 124.125,104.625 U28.1@125.65,106.15 ; U45.1@117.65,114.15 119.093,112.707 119.918,112.707 C45.1 124.125,112.625 U46.1@125.65,114.15 ; U25.1@125.65,98.15 127.093,96.707 127.918,96.707 C25.1 132.125,96.625 U26.1@133.65,98.15 ; U28.1@125.65,106.15 127.093,104.707 127.918,104.707 C28.1 132.125,104.625 U27.1@133.65,106.15 ; U26.1@133.65,98.15 135.093,96.707 136.157,96.707 136.856,97.406 136.856,103.918 136.618,104.156 136.544,104.156 136.075,104.625 C27.1 135.918,104.707 135.093,104.707 U27.1@133.65,106.15
pads on no net: J1.4 J1.5 U46.2

## Polygon pours and split planes (outlines as drawn)
GND on Bottom Layer "GND_L02_P004" (solid, pour order 4): 51.04,119 ccw(c51.04,116.46) 48.5,116.46 48.5,76.54 ccw(c51.04,76.54) 51.04,74 135.96,74 ccw(c135.96,76.54) 138.5,76.54 138.5,116.46 ccw(c135.96,116.46) 135.96,119

## Other copper
Multi-Layer:
  the board outline again, w0.254